# Altium PCB Frost5000Beta_PCB.PcbDoc
Units mm, origin at the board's own origin, x right, y up, seen from the top; angles counter-clockwise.
Board outline 48.5 x 30.5 mm, 2 copper layers (Top Layer, Bottom Layer), stack 0.871 mm thick; 77 components, 62 nets, 271 pads, 180 vias.
Unrouted connection lines stored in the file: 179.
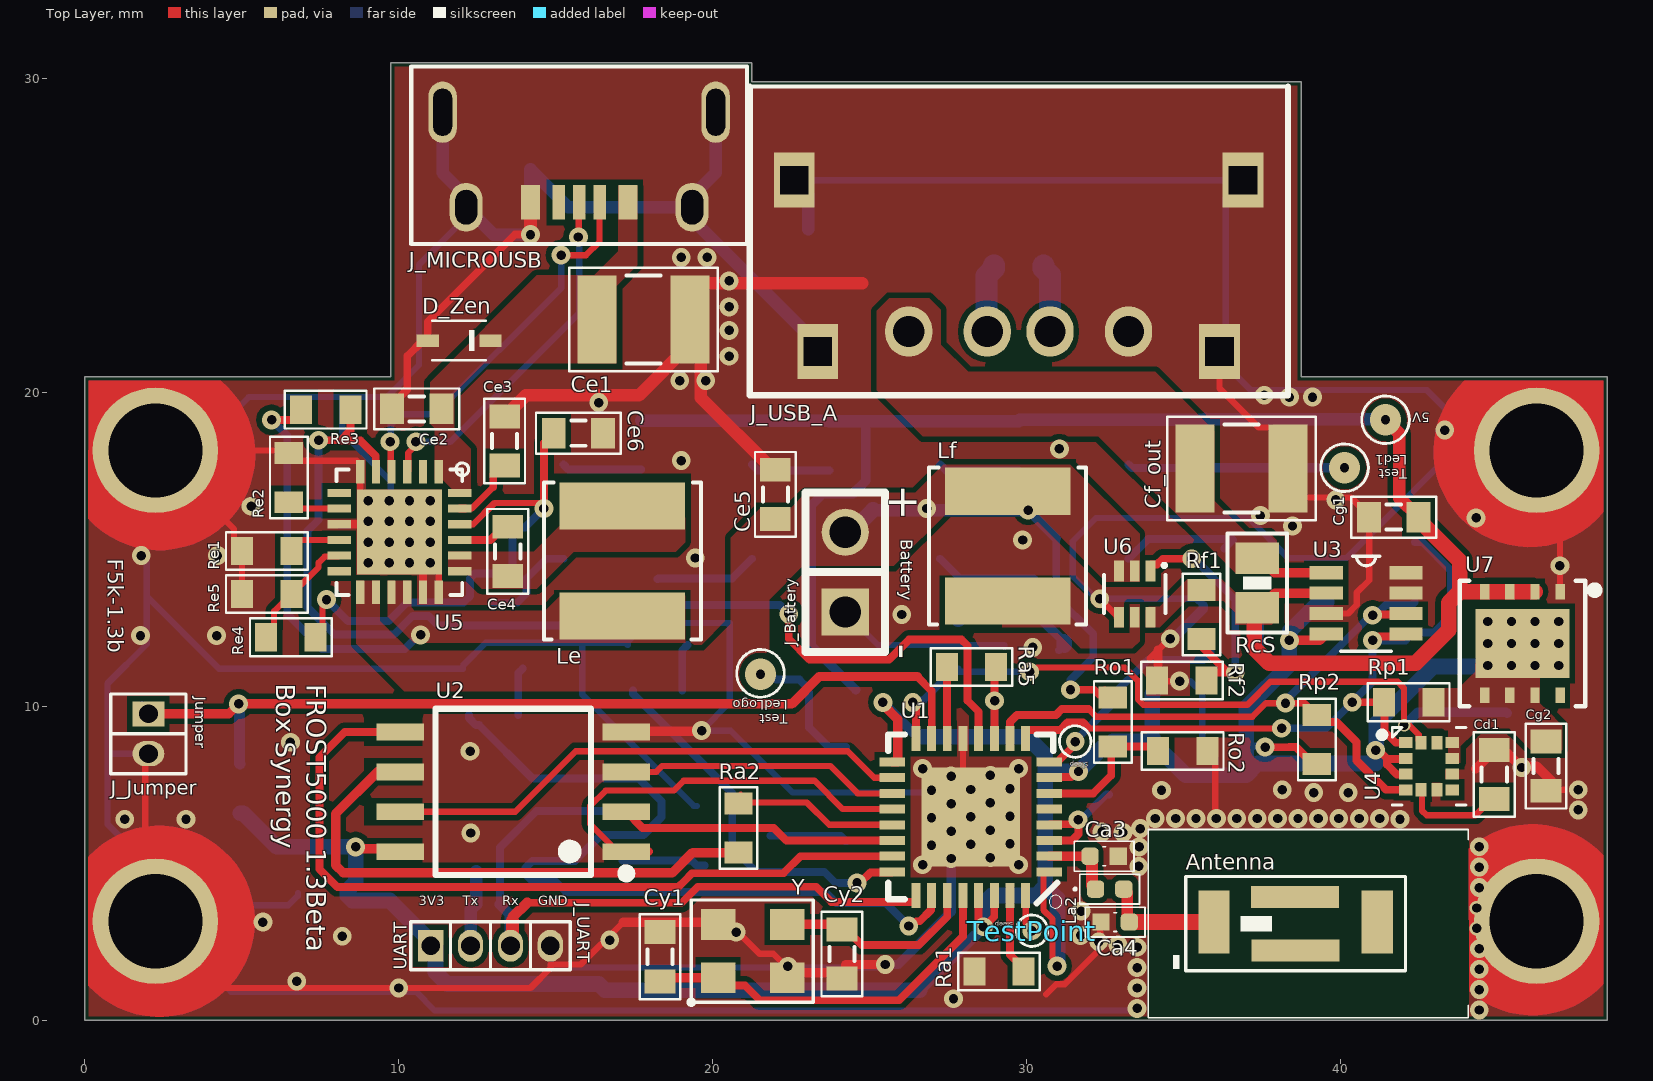
[diagram p0: Top Layer view]
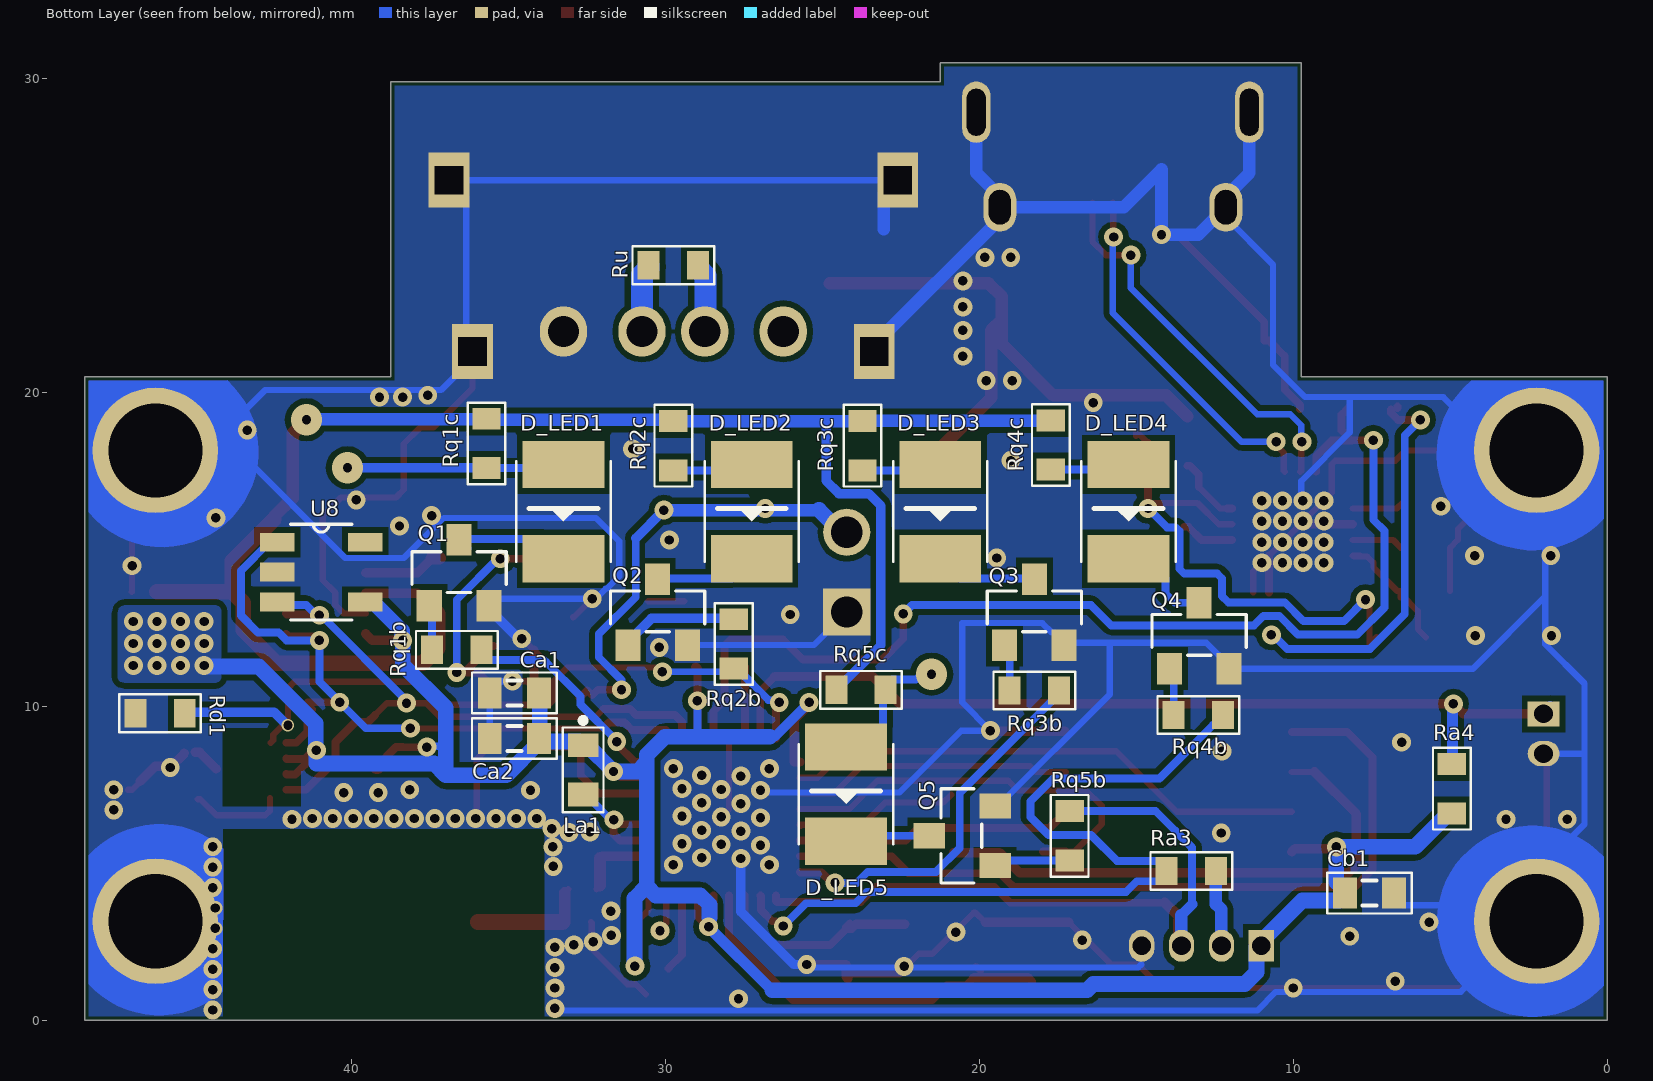
[diagram p1: Bottom Layer view, seen from below]

## Layer stack, top to bottom
Top Solder: solder mask 0.0102, Solder Resist, Dk 3.5
Top Layer: signal copper 0.0356
Dielectric 1: dielectric 0.8, FR-4, Dk 4.8
Bottom Layer: signal copper 0.0356
Bottom Solder: solder mask 0.0102, Solder Resist, Dk 3.5

## Board outline
0,0 0,20.5 9.75,20.5 9.75,30.5 21.25,30.5 21.25,29.9 38.75,29.9 38.75,20.5 48.5,20.5 48.5,0

## Design rules (kind name [scope] priority, off if disabled: settings)
Clearance [All] p1: gap=0.18 ignorepadtopadclearanceinfootprint=FALSE except(0.1: Arc-SMDPad Track-SMDPad SMDPad-SMDPad)
ComponentClearance [All] p1: gap=0.099 collisioncheckmode=3 verticalgap=0.254 showdistances=FALSE
HoleSize [All] p1: absolutevalues=TRUE maxlimit=3 minlimit=0.025 maxpercent=80.000 minpercent=20.000
MinimumSolderMaskSliver [All] p1: minsoldermaskwidth=0.039
PlaneConnect [All] p1: planeconnectstyle=Direct reliefexpansion=0.508 reliefentries=4 reliefconductorwidth=0.254 reliefairgap=0.254
PolygonConnect [All] p1: connectstyle=Direct reliefconductorwidth=0.254 reliefentries=4 polygonreliefangle="90 Angle" airgapwidth=0.254
RoutingVias [All] p1: holewidth=0.3 width=0.6 viastyle="Through Hole" minholewidth=0.008 minwidth=0.4 maxholewidth=4 maxwidth=7.1
SilkToSilkClearance [All] p1: silktosilkclearance=0
SilkToSolderMaskClearance [IsPad] p1: minsilkscreentomaskgap=0.099 clearancetoexposedcopper=TRUE
SolderMaskExpansion [All] p1: expansion=0.102
Width [All] p1: maxlimit=1.2 minlimit=0.2 preferedwidth=0.3
24 further rules are at their usual default settings.

## Components (designator, comment, footprint, x,y, rotation, side; value= is the part's Value field where it differs from the comment)
Antenna "2450AT42B100E" ANTENNA_CERAMIC 38.975,3.075 r180 top
Ca1 "10uF" CAP_0603 34.815,10.425 r0 bottom
Ca2 "100nF" CAP_0603 34.815,8.975 r0 bottom
Ca3 "3.0pF" CAP_0402 32.475,5.225 r0 top
Ca4 "2.4pF" CAP_0402 32.825,3.125 r180 top
Cb1 "4.7uF" CAP_0603 7.575,4.05 r180 bottom
Cd1 "220nF" CAP_0603 44.9,7.825 r90 top
Ce1 "22uF" CAP_1210 17.8,22.325 r0 top
Ce2 "1uF" CAP_0603 10.575,19.475 r0 top
Ce3 "10uF" CAP_0603 13.375,18.45 r270 top
Ce4 "47nF" CAP_0603 13.475,14.935 r270 top
Ce5 "10uF" CAP_0603 22,16.75 r270 top
Ce6 "4.7uF" CAP_0603 15.725,18.7 r0 top
Cf_out "22uF" CAP_1210 36.85,17.575 r0 top
Cg1 "22uF" CAP_0603 41.7,16.025 r180 top
Cg2 "22uF" CAP_0603 46.55,8.094 r270 top
Cy1 "22pF" CAP_0603 18.325,2.02 r90 top
Cy2 "22pF" CAP_0603 24.12,2.11 r270 top
D_LED1 "LCB TTSD-T2V1-2J8L-Z" LED_PLCC-2 33.25,16.2 r90 bottom locked
D_LED2 "LCB TTSD-T2V1-2J8L-Z" LED_PLCC-2 27.25,16.2 r90 bottom locked
D_LED3 "LCB TTSD-T2V1-2J8L-Z" LED_PLCC-2 21.25,16.2 r90 bottom locked
D_LED4 "LCB TTSD-T2V1-2J8L-Z" LED_PLCC-2 15.25,16.2 r90 bottom locked
D_LED5 "LCB TTSD-T2V1-2J8L-Z" LED_PLCC-2 24.25,7.2 r90 bottom locked
D_Zen "DDZ12ASF-7" ZENER-SOD323F 11.925,21.65 r180 top
J_Battery "Connx2_Battery" BATTERY 24.225,14.275 r270 top
J_Jumper "M50-3530242" "JUMPER-1.27 MM" 2.025,9.125 r270 top
J_MICROUSB "CQ-MUB-FS8772" "MICRO USB" 19.35,25.9 r180 top
J_UART "M50-3530442" UART-1.27MM 12.925,2.371 r0 top
J_USB_A "CQ-USB-AFFS90" USB-A__IPX8 33.25,21.94 r180 top
La1 "4.3nH" IND_0603 32.65,7.95 r270 bottom
La2 "2.2nH" IND_0402 32.65,4.175 r0 top
Le "SRN5040TA-1R0M" INDUCTOR_SRN5040 17.125,14.625 r90 top
Lf "SRN5040TA-1R0M" INDUCTOR_SRN5040 29.4,15.1 r90 top
Q1 "ZXT11N20DF" TRANSISTOR_SOT23-3 36.575,14.25 r180 bottom
Q2 "ZXT11N20DF" TRANSISTOR_SOT23-3 30.25,13 r180 bottom
Q3 "ZXT11N20DF" TRANSISTOR_SOT23-3 18.25,13 r180 bottom
Q4 "ZXT11N20DF" TRANSISTOR_SOT23-3 13,12.25 r180 bottom
Q5 "ZXT11N20DF" TRANSISTOR_SOT23-3 20.55,5.875 r90 bottom
Ra1 "12K +- 1%" RES_0603 29.125,1.55 r180 top
Ra2 "200" RES_0603 20.825,6.125 r270 top
Ra3 "499" RES_0603 13.25,4.75 r180 bottom
Ra4 "1K" RES_0603 4.95,7.375 r270 bottom
Ra5 "5.6K" RES_0603 28.25,11.25 r0 top
RcS "ERJ-6BWFR010V" RES-SHUNT-0805 37.351,13.925 r270 top
Rd1 "1K" RES_0603 46.1,9.779 r180 bottom
Re1 "261" RES_0603 5.8,14.95 r180 top
Re2 "205" RES_0603 6.5,17.285 r90 top
Re3 "2.2K" RES_0603 7.675,19.45 r180 top
Re4 "10K" RES_0603 6.565,12.199 r0 top
Re5 "10K" RES_0603 5.8,13.575 r0 top
Rf1 "732K" RES_0603 35.575,12.924 r90 top
Rf2 "93.1K" RES_0603 34.95,10.825 r0 top
Ro1 "332K +-1%" RES_0603 32.75,9.5 r270 top
Ro2 "90.9K +- 1%" RES_0603 34.975,8.575 r180 top
Rp1 "10K" RES_0603 42.175,10.129 r180 top
Rp2 "10K" RES_0603 39.25,8.94 r90 top
Rq1b "1K" RES_0603 36.65,11.8 r180 bottom
Rq1c "130" RES_0603 35.7,18.375 r90 bottom
Rq2b "1K" RES_0603 27.825,11.987 r270 bottom
Rq2c "130" RES_0603 29.75,18.3 r90 bottom
Rq3b "1K" RES_0603 18.25,10.5 r180 bottom
Rq3c "130" RES_0603 23.725,18.3 r90 bottom
Rq4b "1K" RES_0603 13.025,9.725 r180 bottom
Rq4c "130" RES_0603 17.725,18.325 r90 bottom
Rq5b "1K" RES_0603 17.125,5.875 r90 bottom
Rq5c "130" RES_0603 23.775,10.525 r0 bottom
Ru "10" RES_0603 29.75,24.05 r180 bottom
TestPoint "TestPoint" TESTPOINT 30.175,2.85 r90 top
U1 "ESP8266EX" ESP8266_QFN32-5X5MM 28.225,6.475 r180 top
U2 "W25Q32JVSSIQ" W25Q32JVSSIQ_SOIC127P790X216-8N 13.65,7.275 r180 top
U3 "INA219BIDCNR" "INA219B SOT23" 40.82,13.28 r0 top
U4 "LSM303AGR" LSM303AGR-LGA12 42.825,8.089 r0 top
U5 "BQ25606RGER" BQ25606 10.025,15.55 r270 top value=Value
U6 "TPS61023DRLT" TPS61023-SOT563 33.45,13.575 r270 top
U7 "LM1117LD-3.3/NOPB" LM1117-3.3-WSON-8 45.8,12 r270 top
U8 "EEPROM 128K" 24CW128 40.969,14.275 r180 bottom
Y "ABM8-26MHz" ABM8-26_OSCSC320X250X100N 21.275,2.2 r90 top

## Footprints (in the part's own frame and the unit in brackets; to place one, negate y for a bottom-side part, rotate by r counter-clockwise, add the part's x,y. Pads: shape width x height; smd on the part's side, far side on the other; paste and mask are expansions set on the pad)
24CW128 [mm] "Footprint EEPROM SOT23"
  rect 1.1x0.6 smd: 1(-1.4,0.95) 2(-1.4,0) 3(-1.4,-0.95) 4(1.4,-0.95) 5(1.4,0.95)
  silkscreen extent -0.97,-1.53 0.97,1.53, body extent -1.25,-1.5 1.25,1.5, height 1.11
ABM8-26_OSCSC320X250X100N [mm] "Crystal de 26MHz"
  rect 0.98x1.1 smd: 1(-0.85,1.1) 2(-0.85,-1.1) 3(0.85,-1.1) 4(0.85,1.1)
  silkscreen extent -1.71,-1.93 1.63,2.04, body extent -1.25,-1.6 1.25,1.6, height 2.63
ANTENNA_CERAMIC [mm] "PCB CERAMIC ANTENNA"
  rect 1x2 smd: 1(3,-0.05) 2(-2.2,-0.05)
  rect 2.8x0.7 smd: 3(0.4,0.85) 4(0.425,-0.85)
  silkscreen extent -5.1,-3 5.1,3, body extent -2.1,-1 2.9,1, height 2.63
BATTERY [mm] "Footprint Battery"
  round 1.5 hole 1: 1(-1.27,0)
  rect 1.5x1.5 hole 1: 2(1.27,0)
  silkscreen extent -2.54,-1.27 2.54,1.27
BQ25606 [mm] "Footprint BQ25606 Charger"
  rect 0.74x0.26 smd mask+0.065: 1(-1.92,1.25) 2(-1.92,0.75) 3(-1.92,0.25) 4(-1.92,-0.25) 5(-1.92,-0.75) 6(-1.92,-1.25) 13(1.92,-1.25) 14(1.92,-0.75) 15(1.92,-0.25) 16(1.92,0.25) 17(1.92,0.75) 18(1.92,1.25)
  rect 0.26x0.74 smd mask+0.065: 7(-1.25,-1.92) 8(-0.75,-1.92) 9(-0.25,-1.92) 10(0.25,-1.92) 11(0.75,-1.92) 12(1.25,-1.92) 19(1.25,1.92) 20(0.75,1.92) 21(0.25,1.92) 22(-0.25,1.92) 23(-0.75,1.92) 24(-1.25,1.92)
  rect 2.7x2.7 smd mask+0.065: 25(0,0)
  silkscreen extent -2.2,-2 2,2.2, body extent -2.05,-2.05 2.05,2.05, height 1.07
CAP_0402 [mm] "Footprint Cap Ceramic 0402"
  rrect50% 0.55x0.55 smd: 1(-0.45,0)
  rect 0.55x0.55 smd: 2(0.45,0)
  silkscreen extent -0.95,-0.48 0.95,0.48, body extent -0.5,-0.25 0.5,0.25, height 0.51
CAP_0603 [mm] "Footprint Cap Ceramic 0603"
  rect 0.762x0.976 smd: 1(-0.785,0) 2(0.785,0)
  silkscreen extent -1.35,-0.65 1.35,0.65, body extent -0.8,-0.4 0.8,0.4, height 0.81
CAP_1210 [mm] "Footprint Cap Ceramic 1210"
  rect 1.24x2.81 smd: 1(-1.485,0) 2(1.485,0)
  silkscreen extent -2.36,-1.65 2.36,1.65, body extent -1.6,-1.25 1.6,1.25, height 0.79
ESP8266_QFN32-5X5MM [mm] "Footprint del ESP8266EX"
  rect 0.8x0.285 smd mask+0.065: 1(-2.5,1.75) 2(-2.5,1.25) 3(-2.5,0.75) 4(-2.5,0.25) 5(-2.5,-0.25) 6(-2.5,-0.75) 7(-2.5,-1.25) 8(-2.5,-1.75) 17(2.5,-1.75) 18(2.5,-1.25) 19(2.5,-0.75) 20(2.5,-0.25) 21(2.5,0.25) 22(2.5,0.75) 23(2.5,1.25) 24(2.5,1.75)
  rect 0.285x0.8 smd mask+0.065: 9(-1.75,-2.5) 10(-1.25,-2.5) 11(-0.75,-2.5) 12(-0.25,-2.5) 13(0.25,-2.5) 14(0.75,-2.5) 15(1.25,-2.5) 16(1.75,-2.5) 25(1.75,2.5) 26(1.25,2.5) 27(0.75,2.5) 28(0.25,2.5) 29(-0.25,2.5) 30(-0.75,2.5) 31(-1.25,2.5) 32(-1.75,2.5)
  rect 3.15x3.15 smd paste-3: EP(0,0)
  silkscreen extent -2.9,-2.63 2.63,2.9, body extent -2.5,-2.5 2.5,2.5, height 1.55
"INA219B SOT23" [mm] "Current Monitor"
  rect 1.067x0.42 smd mask+0.09: 1(-1.27,0.975) 2(-1.275,0.325) 3(-1.27,-0.325) 4(-1.27,-0.975) 5(1.27,-0.975) 6(1.27,-0.325) 7(1.27,0.325) 8(1.27,0.975)
  silkscreen extent -0.81,-1.52 0.81,1.5, body extent -1.4,-1.47 1.4,1.47, height 1.2
IND_0402 [mm] "Footprint de Inductor 0402"
  rrect50% 0.55x0.55 smd: 1(-0.45,0) 2(0.45,0)
  silkscreen extent -1.14,-0.48 0.95,0.48, body extent -0.5,-0.3 0.5,0.3, height 0.51
IND_0603 [mm] "Footprint de Inductor 0603"
  rect 0.762x0.976 smd: 1(-0.81,0.025) 2(0.76,0.025)
  silkscreen extent -1.67,-0.63 1.33,0.67, body extent -0.8,-0.45 0.8,0.5, height 0.81
INDUCTOR_SRN5040 [mm] "Inductor_SRN5040"
  rect 1.5x4 smd: 1(-1.75,0) 2(1.75,0)
  silkscreen extent -2.5,-2.5 2.5,2.5, body extent -2.5,-2.5 2.5,2.5, height 4.01
"JUMPER-1.27 MM" [mm] "Footprint Jumper"
  rect 0.8x1.016 hole 0.6: 1(-0.635,0)
  oval 0.8x1.016 hole 0.6: 2(0.635,0)
  silkscreen extent -1.27,-1.2 1.28,1.2, body extent -1.27,-1.2 1.27,1.2, height 4.85
LED_PLCC-2 [mm] "Footprint_LED_PLCC-2"
  rect 1.5x2.6 smd: 1(-1.5,0) 2(1.5,0)
  silkscreen extent -1.6,-1.5 1.6,1.5, body extent -1.73,-1.4 1.85,1.4, height 1.67
LM1117-3.3-WSON-8 [mm] "Footprint del LDO de Texas"
  rect 0.5x0.3 smd mask+0.07: 1(-1.65,1.2) 2(-1.65,0.4) 3(-1.65,-0.4) 4(-1.65,-1.2) 5(1.65,-1.2) 6(1.65,-0.4) 7(1.65,0.4) 8(1.65,1.2)
  rect 2.2x3 smd mask+0.07: 9(0,0)
  silkscreen extent -2,-2 2,2.4, body extent -2,-2 2,2, height 0.81
LSM303AGR-LGA12 [mm] "Footprint LSM303AGR"
  rect 0.43x0.35 smd mask+0.033: 1(-0.745,0.75) 2(-0.745,0.25) 3(-0.745,-0.25) 4(-0.745,-0.75) 7(0.745,-0.75) 8(0.745,-0.25) 9(0.745,0.25) 10(0.745,0.75)
  rect 0.35x0.43 smd mask+0.033: 5(-0.25,-0.745) 6(0.25,-0.745) 11(0.25,0.745) 12(-0.25,0.745)
  silkscreen extent -1.6,-1.24 1.17,1.24, body extent -1,-1 1,1, height 0.97
"MICRO USB" [mm] "Footprint MicroUSB"
  oval 0.9x1.95 hole 0.6 slot 1.5 at 90 deg: 0(-0.75,-3.025) 0(7.95,-3.025)
  oval 1.05x1.55 hole 0.7 slot 1.1 at 90 deg: 0(0,0) 0(7.2,0)
  rect 0.6x1.1 smd mask+0.08: 1(2.05,-0.15) 5(5.15,-0.15)
  rect 0.4x1.1 smd mask+0.08: 2(2.95,-0.15) 3(3.6,-0.15) 4(4.25,-0.15)
  silkscreen extent -1.75,-4.47 8.95,1.17, body extent -1.35,-7.02 8.55,0.28, height 4.32
RES-SHUNT-0805 [mm] "SHUNT 0805"
  rect 1x1.4 smd: 1(-0.785,0) 2(0.785,0)
  silkscreen extent -1.57,-0.95 1.58,0.95, body extent -0.99,-0.66 1.03,0.61, height 0.63
RES_0603 [mm] "Footprint Resistor 0603"
  rect 0.7x0.9 smd: 1(-0.785,0) 2(0.785,0)
  silkscreen extent -1.3,-0.6 1.3,0.6, body extent -0.8,-0.4 0.8,0.4, height 0.46
TESTPOINT [mil] "Via_TestPoint"
  round 15 all layers, no hole: 1(0,0)
TPS61023-SOT563 [mm] "Footprint Boost"
  rect 0.66x0.31 smd mask+0.07: 1(-0.735,0.5) 2(-0.735,0) 3(-0.735,-0.5) 4(0.735,-0.5) 5(0.735,0) 6(0.735,0.5)
  silkscreen extent -0.96,-0.97 0.6,0.99, body extent -0.81,-0.8 0.81,0.8, height 0.6
TRANSISTOR_SOT23-3 [mm] "Transistor NPN"
  rect 0.8x1 smd: B(-0.95,-1.05) C(0,1.05) E(0.95,-1.05)
  silkscreen extent -1.5,-0.63 1.5,0.67, body extent -1.5,-1.25 1.5,1.25, height 1.11
UART-1.27MM [mm] "Socket UART"
  rect 0.8x1.016 hole 0.6: 1(-1.905,0)
  oval 0.8x1.016 hole 0.6: 2(-0.635,0) 3(0.635,0) 4(1.905,0)
  silkscreen extent -2.54,-0.76 2.54,0.76, body extent -2.54,-1.2 2.54,1.2, height 4.85
USB-A__IPX8 [mm] "Footprint del USB tipo A"
  rect 1.3x1.75 hole 0.9 square: 0(-3.65,-4.82) 0(-2.9,0.64) 0(9.9,0.64) 0(10.65,-4.82)
  oval 1.5x1.6 hole 1: 1(7,0) 2(4.5,0) 3(2.5,0) 4(0,0)
  silkscreen extent -5.08,-7.8 12.07,2.03, body extent -4.15,-10.95 11.15,1.2, height 7.46
W25Q32JVSSIQ_SOIC127P790X216-8N [mil] "Memoria Flash SOIC8 SS"
  rect 60x21 smd: 1(-141.73,75) 2(-141.73,25) 3(-141.73,-25) 4(-141.73,-75) 5(141.73,-75) 6(141.73,-25) 7(141.73,25) 8(141.73,75)
  silkscreen extent -151,-104 97,111, body extent -161,-106 161,106, height 85
ZENER-SOD323F [mm] "Fooprint Zener"
  rect 0.71x0.403 smd: A(1,0) C(-1,0)
  silkscreen extent -0.85,-0.63 0.85,0.63, body extent -1.25,-0.67 1.25,0.68, height 1.01

## Part data
Antenna: library part AntennaCeramic, "Ceramic Antenna SMD", Supplier Part Number 1=609-2450AT42B100E, Supplier 1=Mouser
Ca1 Ca2 Cb1 Cd1 Ce2 Ce3 Ce4 Ce5 Ce6 Cg1 Cg2 Cy1 Cy2: library part Cap_0603_Ceramic, "Capac Ceramic SMD 0603"
Ca3 Ca4: library part Cap_0402, "Capac Ceramic SMD 0402"
Ce1 Cf_out: library part Cap_1210_Ceramic, "Capac Ceramic SMD 1210"
D_LED1 D_LED2 D_LED3 D_LED4 D_LED5: library part LCB_TTSD, "Blue LED PLCC-2", Package="0603 Broadcom", Availability=Unavailable, MF="Broadcom Limited", MP=HSMW-C191, Price=None, SnapEDA_Link=https://www.snapeda.com/parts/HSMW-C191/Broadcom%20Limited/view-part/1840124/?ref=snap
D_Zen: library part Zener, "Zener 11.5V-0.5W", Package="SOD-123 Littelfuse", Supplier Part Number 1=621-DDZ12ASF-7, Availability=Unavailable, MF=Littelfuse, MP=SMF5.0AT1G, Price=None, SnapEDA_Link=https://www.snapeda.com/parts/SMF5.0AT1G/Littelfuse/view-part/4502608/?ref=snap, Supplier 1=Mouser
J_Battery: "NO SOCKET"
J_Jumper: library part Jumper, "1.27mm Pin Header 2x1", Supplier Part Number 1=855-M50-3530242, Supplier 1=Mouser
J_MICROUSB: library part MicroUSB, "MicroUSB B-type Socket"
J_UART: library part Connx4_UART, "1.27mm Pin Header 4x1", Supplier Part Number 1=855-M50-3530442, Supplier 1=Mouser
J_USB_A: library part "USB-A 5V", "USB-A Socket"
La1: library part Ind_0603, "Inductor SMD 0603", Package="0603 Murata", Availability=Unavailable, MF=Murata, MP=LQP03TN62NHZ2D, Price=None, SnapEDA_Link=https://www.snapeda.com/parts/LQP03TN62NHZ2D/Murata/view-part/4472751/?ref=snap
La2: library part Ind_0402, "Inductor SMD 0402", Package="0603 Murata", Availability=Unavailable, MF=Murata, MP=LQP03TN62NHZ2D, Price=None, SnapEDA_Link=https://www.snapeda.com/parts/LQP03TN62NHZ2D/Murata/view-part/4472751/?ref=snap
Le Lf: library part Ind_SRN5040, "Inductor 1uH 5A", Package="Nonstandard Vishay Dale", Supplier Part Number 1=652-SRN5040TA-1R0M, Availability=Unavailable, MF="Vishay Dale", Price=None, SnapEDA_Link=https://www.snapeda.com/parts/IHLP-2525CZ-01/Vishay%20Dale/view-part/561997/?ref=snap, Supplier 1=Mouser
Q1 Q2 Q3 Q4 Q5: "Transistor NPN Low Saturation Vce - SOT23-3", Supplier Part Number 1=522-ZXT11N20DFTA, Supplier 1=Mouser
Ra1 Ra2 Ra3 Ra4 Ra5 Rd1 Re1 Re2 Re3 Re4 Re5 Rf1 Rf2 Ro1 Ro2 Rp1 Rp2 Rq1b Rq1c Rq2b Rq2c Rq3b Rq3c Rq4b Rq4c Rq5b Rq5c Ru: library part Res_0603, "Resistor SMD", LatestRevisionDate=17-Jul-2002, LatestRevisionNote="Re-released for DXP Platform.", PackageDescription="Axial Device, Thru-Hole; 2 Leads; 0.3 in Pin Spacing", PackageReference=AXIAL-0.3, Published=8-Jun-2000, Publisher="Altium Limited"
RcS: library part Shunt_0805, "Shunt 0.01 Ohm 0.5W 1% SMD Resistor", Supplier Part Number 1=667-ERJ-6BWFR010V, LatestRevisionDate=17-Jul-2002, LatestRevisionNote="Re-released for DXP Platform.", PackageDescription="Axial Device, Thru-Hole; 2 Leads; 0.3 in Pin Spacing", PackageReference=AXIAL-0.3, Published=8-Jun-2000, Publisher="Altium Limited", Supplier 1=Mouser
U1: "Microcontrolador ESP8266", Package="VFQFN-32 Espressif Systems", Supplier Part Number 1=356-ESP8266EX, Availability=Unavailable, MF="Espressif Systems", MP=ESP8266, Price=None, SnapEDA_Link=https://www.snapeda.com/parts/ESP8266/Espressif%20Systems/view-part/106411/?ref=snap, Supplier 1=Mouser
U2: "FLASH - NOR Memory IC 32Mb _4M x 8_ SPI - Quad I/O 133MHz 8-SOIC", Package="SOIC-8 Winbond", Availability=Unavailable, MF=Winbond, MP=W25Q32JVSSIQ, Price=None, SnapEDA_Link=https://www.snapeda.com/parts/W25Q32JVSSIQ/Winbond%20Electronics/view-part/596953/?ref=snap
U3: "Current Monitor Regulator High-Side 10mA SOT-23-8", Package="SOT-23 Texas Instruments", Supplier Part Number 1=595-INA219BIDCNR, Digi-Key_Part_Number=296-46420-1-ND, Digi-Key_Purchase_URL=https://www.digikey.com.au/product-detail/en/texas-instruments/INA219BIDCNR/296-46420-1-ND/7033594?utm_source=snapeda&utm_medium=aggregator&utm_campaign=symbol, MF="Texas Instruments", MP=INA219BIDCNR, SnapEDA_Link=https://www.snapeda.com/parts/INA219BIDCNR/Texas%20Instruments/view-part/870494/?ref=snap, Supplier 1=Mouser
U4: "Accelerometer, Magnetometer", Package="VFLGA-12 STMicroelectronics", Supplier Part Number 1=497-16527-1-ND, Availability=Unavailable, MF=STMicroelectronics, MP=LSM303AGR, Price=None, SnapEDA_Link=https://www.snapeda.com/parts/LSM303AGR/STMicroelectronics/view-part/3601838/?ref=snap, Supplier 1=Digi-Key
U5: "Battery Charger 3A", Manufacturer="Texas Instruments", Supplier Part Number 1=595-BQ25606RGER, Copyright="Copyright (C) 2018 Accelerated Designs. All rights reserved", PartNumber=BQ25606RGER, RefDes=RefDes, Supplier 1=Mouser, Type=DEV
U6: "Boost Switching Regulator 3A", Package="SOT-563 Texas Instruments", Supplier Part Number 1=595-TPS61023DRLR, Availability=Unavailable, MF="Texas Instruments", MP=TPS61023DRLT, Price=None, SnapEDA_Link=https://www.snapeda.com/parts/TPS61023DRLT/Texas%20Instruments/view-part/4477974/?ref=snap, Supplier 1=Mouser
U7: "LDO Regulator Pos 3.3V 0.8A Texas - WSON8", Package="SOT-223-3 Analog Devices", Supplier Part Number 1=926-LM1117LD33NOPB, Availability=Unavailable, MF="Analog Devices", MP=LT1117IST-5#PBF, Price=None, SnapEDA_Link=https://www.snapeda.com/parts/LT1117IST-5%23PBF/Analog%20Devices/view-part/4348177/?ref=snap, Supplier 1=Mouser
U8: library part 24CW1280T-I/OT, Supplier Part Number 1=579-24CW1280T-I/OT, Supplier 1=Mouser
Y: "26MHz ±10ppm Crystal 10pF 50 Ohms 4-SMD, No Lead", Package="SMD-4 Abracon", Supplier Part Number 1=815-ABM8-26-T, Digi-Key_Part_Number=300-8230-1-ND, Digi-Key_Purchase_URL=https://www.digikey.com/product-detail/en/abracon-llc/ABM8-26.000MHZ-10-1-U-T/300-8230-1-ND/687923?utm_source=snapeda&utm_medium=aggregator&utm_campaign=symbol, MF=Abracon, MP=ABM8-26.000MHZ-10-1-U-T, SnapEDA_Link=https://www.snapeda.com/parts/ABM8-26.000MHZ-10-1-U-T/Abracon%20LLC/view-part/356267/?ref=snap, Supplier 1=Mouser

## Free pads (board coordinates)
  round 4 hole 3: H(2.25,3.15) H(2.25,18.15) H(46.25,3.15) H(46.25,18.15)

## Via types
v1: diameter 0.6, hole 0.3, Top Layer to Bottom Layer, tented both sides, 172 vias
v2: diameter 1, hole 0.3, Top Layer to Bottom Layer, 3 vias
v3: diameter 0.6, hole 0.3, Top Layer to Bottom Layer, 2 vias
v4: diameter 0.45, hole 0.3, Top Layer to Bottom Layer, 2 vias
v5: diameter 0.4, hole 0.3, Top Layer to Bottom Layer, tented both sides, 1 vias

## Nets (pads, with @x,y where several pads share a name; then routed paths per layer and width w, separated by ;. In a path a pad name is that pad's centre, name@x,y a point inside that pad or via, vN(x,y) a via of type N, cw(c..) or ccw(c..) an arc to the next point about the centre after c; other vN are vias at no path point)
3.3uC: La1.2 U1.3 U1.4 | length 3.9
  Top Layer w0.25: U1.3 31.45,5.725 31.658,5.933 31.658,6.372 31.63,6.4 31.473,6.242 30.742,6.242 U1.4
  Bottom Layer w0.25: v1@31.644,6.291 32.543,7.19 La1.2
  Bottom Layer w0.3: v1@31.644,6.291 v1(31.644,6.386)
3.3V: Ca1.1 Ca2.1 Cb1.1 Cg2.1 J_UART.1 La1.1 Ra4.2 Ra5.2 Rp1.1 Rp2.1 U1.1 U1.7 U1.11 U1.17 U1.29 U1.30 U2.8 U3.4 U4.2 U4.3 U4.9 U4.10 U7.5 U7.6 U7.7 U7.9 U8.4 | length 87.7
  Top Layer w0.2: v1(28.625,2.975) v1@28.65,2.975 ; U1.1 30.542,4.725 30.542,3.508 30.825,3.225 v1@30.825,1.983
  Top Layer w0.25: v1@28.475,3.233 U1.29 ; v1@28.65,2.975 28.975,3.3 U1.30 ; U1.11@28.983,8.983 v1(28.983,10.175) Ra5.2@28.983,11.198 ; U1.7@30.733,7.717 30.758,7.742 v1@31.424,7.742 ; v1@37.874,8.695 38.376,8.695 38.381,8.7 38.583,8.7 Rp2.1@39.189,8.094 ; v1(41.12,8.6) 41.214,8.6 41.489,8.325 ; U4.3 42.066,7.825 41.8,7.825 41.489,8.136 41.489,8.325 ; U4.2 42.066,8.325 41.489,8.325
  Top Layer w0.3: v1(8.628,5.523) 8.685,5.465 9.955,5.465 U2.8 ; v1(25.425,10.125) 25.425,10.053 25.893,9.585 25.893,8.233 25.885,8.225 U1.17 ; Ra5.2@28.983,11.198 Ra5.2 ; v1(38.375,12.1) 39.345,12.1 U3.4
  Top Layer w0.5: Rp2.1@39.189,8.094 Rp2.1
  Bottom Layer w0.25: v1(28.983,10.175) 28.983,9.042 29,9.025 ; 37,8.725 37.577,8.725 v1(37.602,8.7)
  Bottom Layer w0.3: v1(25.425,10.125) 26.525,9.025 26.675,9.025
  Bottom Layer w0.35: 26.6,0.95 v1(28.625,2.975)
  Bottom Layer w0.5: Ra4.2 5.05,6.59 6.117,5.523 v1(8.628,5.523) 8.628,4.399 8.36,4.132 Cb1.1 8.36,3.968 8.516,3.812 9.713,3.812 11.17,2.355 11.17,1.527 11.547,1.15 16.374,1.15 16.574,0.95 26.6,0.95 ; 26.675,9.025 29,9.025 30.025,9.025 30.6,8.45 30.6,8.218 ; v1@28.6,3.268 28.6,3.682 28.893,3.975 30.307,3.975 30.6,4.268 ; v1(30.975,1.725) 30.989,1.739 30.989,3.879 30.6,4.268 ; v1(31.656,7.923) 32.493,8.76 La1.1 32.745,8.88 33.935,8.88 Ca2.1 34.03,8.843 35.073,7.8 37,7.8 ; v1@31.702,7.925 30.893,7.925 30.6,8.218 ; Ca2.1@34.005,9.329 34.005,10.4 Ca1.1 ; U8.4 39.319,13.325 38.394,12.4 38.394,12.119 v1(38.375,12.1) 38.375,11.325 37,9.95 37,8.725 37,7.8 ; v1(44.7,11.3) 44.67,11.27 42.955,11.27 41.139,9.454 41.139,8.619 v1(41.12,8.6) 41.12,8.175 37.375,8.175 37,7.8 ; 30.6,4.268 30.6,8.218
  other v1: 45.45,11.3 46.2,11.3 46.95,11.3 44.7,12 45.45,12 46.2,12 46.95,12 44.7,12.7 45.45,12.7 46.2,12.7 46.95,12.7
5V: Cg1.1 RcS.2 Rf1.2 Rq1c.2 Rq2c.2 Rq3c.2 Rq4c.2 Rq5c.2 U3.2 U6.6 U7.2 U7.3 U7.4 | length 55
  Top Layer w0.2: U7.4@44.55,13.7 U7.4
  Top Layer w0.3: RcS.2@37.445,13.14 37.91,13.605 U3.2 ; Cg1.1@42.485,15.943 Cg1.1
  Top Layer w0.4: v2(41.438,19.128) 41.875,18.69 41.875,16.635 Cg1.1
  Top Layer w0.5: RcS.2@37.45,13.14 37.255,12.945 37.255,11.845 37.73,11.37 42.393,11.37 43.45,12.427 43.45,13.3 43.8,13.65 ; Cg1.1@42.485,15.943 43.8,14.628 43.8,13.65 ; U7.2 U7.3 U7.4 43.8,13.65
  Bottom Layer w0.3: Rq5c.2 23.145,11.94 23.145,16.395 23.525,16.775 24.475,16.775 24.879,17.179 24.879,19.039 24.925,19.085
  Bottom Layer w0.4: Rq4c.2 17.738,19.097 23.713,19.097 Rq3c.2 24.925,19.085 Rq2c.2 29.787,19.122 35.662,19.122 Rq1c.2 35.716,19.144 41.421,19.144 v2(41.438,19.128)
5Vin: Ce1.1 Ce2.2 D_Zen.C J_MICROUSB.1 U5.1 U5.24
5Vout: Cf_out.1 J_USB_A.1 RcS.1 U3.1 | length 2.5
  Top Layer w0.3: RcS.1@37.445,14.71 37.9,14.255 U3.1
  Top Layer w0.4: RcS.1@37.2,14.71 RcS.1@37.445,14.71
A-Colector1: D_LED1.1 Q1.C | length 4
  Bottom Layer w0.25: D_LED1.1 33.875,15.325 36.55,15.325 Q1.C Q1.C@36.3,15.025
A-Colector2: D_LED2.1 Q2.C | length 3.3
  Bottom Layer w0.25: D_LED2.1 27.875,14.075 30.225,14.075 Q2.C
A-Colector3: D_LED3.1 Q3.C | length 3.3
  Bottom Layer w0.25: Q3.C 18.275,14.075 20.625,14.075 D_LED3.1
A-Colector4: D_LED4.1 Q4.C | length 3.1
  Bottom Layer w0.25: Q4.C 13.775,13.3 14.075,13.6 14.075,14.075 14.7,14.7 D_LED4.1
A-Colector5: D_LED5.1 Q5.C | length 2.5
  Bottom Layer w0.25: Q5.C@21.85,5.875 24.075,5.875 D_LED5.1
ADCin: Ro1.2 Ro2.2 U1.6 | length 4.6
  Top Layer w0.25: U1.6 32.125,7.225 32.7,7.8 32.7,8.665 Ro1.2 34.05,8.715 Ro2.2
Base1: Q1.B Rq1b.1 | length 1.4
  Bottom Layer w0.25: Rq1b.1 37.435,13.11 Q1.B
Base2: Q2.B Rq2b.1 | length 4
  Bottom Layer w0.25: Q2.B@31.035,11.785 Q2.B
  Bottom Layer w0.3: Rq2b.1@27.853,12.8 30.45,12.8 Q2.B@31.2,12.05
  Bottom Layer w0.5: Rq2b.1 Rq2b.1@27.853,12.8 ; Q2.B Q2.B@31.2,12.05
Base3: Q3.B Rq3b.1 | length 1.5
  Bottom Layer w0.25: Rq3b.1 19.035,11.785 Q3.B
Base4: Q4.B Rq4b.1 | length 1.5
  Bottom Layer w0.25: Rq4b.1 13.81,11.06 Q4.B
Base5: Q5.B Rq5b.1 | length 2.7
  Bottom Layer w0.25: Rq5b.1 19.335,5.09 Q5.B Q5.B@19.75,4.925
CLK_MEM: Ra2.2 U2.6 | length 17.4
  Top Layer w0.2: U2.6@9.326,7.91 U2.6
  Top Layer w0.3: U2.6@9.326,7.91 7.998,6.581 7.998,4.932 8.235,4.695 18.718,4.695 19.363,5.34 Ra2.2
CS_MEM: U1.20 U2.1 | length 13.1
  Top Layer w0.2: U2.1 16.983,5.37 16.105,6.248 16.105,6.83 16.59,7.315 18.765,7.315 19.075,7.625 23.25,7.625 24.15,6.725 U1.20
  Top Layer w0.25: U2.1 U2.1@17.974,5.37
D+: J_MICROUSB.3 U5.3 | length 11.5
  Top Layer w0.2: U5.3 10.305,17.5 10.305,18.072 10.55,18.317 v1(10.55,18.425) ; v1(15.725,24.95) 15.737,24.963 15.737,26.037 J_MICROUSB.3
  Bottom Layer w0.2: v1(10.55,18.425) 11.65,18.425 15.755,22.53 15.755,24.92 v1(15.725,24.95)
D-: J_MICROUSB.2 U5.4 | length 12.5
  Top Layer w0.2: v1(9.725,18.425) 9.75,18.4 9.75,17.495 U5.4 ; v1(15.175,24.375) 15.18,24.37 15.965,24.37 16.4,24.805 J_MICROUSB.2
  Bottom Layer w0.2: v1(9.725,18.425) 9.75,18.45 9.75,18.95 10.1,19.3 11.15,19.3 15.175,23.325 v1(15.175,24.375)
DCP+: J_USB_A.3 Ru.1 | length 2.2
  Bottom Layer w0.7: Ru.1 30.535,23.95 30.75,23.735 J_USB_A.3
DCP-: J_USB_A.2 Ru.2 | length 2.2
  Bottom Layer w0.7: J_USB_A.2 28.73,21.96 28.73,23.715 28.965,23.95 Ru.2
DI_MEM: U1.23 U2.5 | length 25.4
  Top Layer w0.25: U2.5 8.28,9.18 7.475,8.375 7.475,4.811 8.046,4.24 18.907,4.24 19.095,4.428 19.347,4.68 22.255,4.68 22.8,5.225 U1.23
DO_MEM: U1.22 U2.2 | length 8.9
  Top Layer w0.25: U2.2 17.765,6.125 21.95,6.125 22.35,5.725 U1.22
GND: Ca1.2 Ca2.2 Ca3.2 Ca4.2 Cb1.2 Cd1.2 Ce1.2 Ce2.1 Ce3.1 Ce5.1 Ce6.2 Cf_out.2 Cg1.2 Cg2.2 Cy1.2 Cy2.2 D_Zen.A J_Battery.2 J_Jumper.2 J_MICROUSB.0 J_MICROUSB.5 J_UART.4 J_USB_A.0 J_USB_A.4 pad.H Q1.E Q2.E Q3.E Q4.E Q5.E Ra1.2 Rd1.1 Re1.2 Re2.2 Re5.1 Rf2.1 Ro2.1 U1.13 U1.EP U2.4 U3.3 U3.7 U3.8 U4.6 U4.8 U5.6 U5.9 U5.17 U5.18 U5.25 U6.4 U7.1 U8.2 Y.2 Y.4 | length 331.7
  Top Layer w0.2: J_Jumper.2 1.93,8.395 1.93,3.47 4.375,1.025 14.198,1.025 14.84,1.667 14.84,1.775 15.805,1.775 17.15,3.12 ; Re5.1@5.005,13.675 5.005,15.05 4.755,15.3 4.755,15.645 2.25,18.15 6.42,18.15 Re2.2 6.75,17.82 8.665,17.82 8.775,17.71 U5.6 8.775,16.8 9.775,15.8 U5.25 10.775,14.8 11.275,14.3 U5.18 ; U2.4 U2.4@17.273,9.203 ; v1@19.627,9.203 v1(19.65,9.225) ; Y.4@19.82,3.12 20.125,3.425 20.185,3.425 21.495,2.115 21.935,2.115 Y.2@22.535,1.515 ; Cy2.2@24,1.515 Cy2.2@24.19,1.325 ; U1.13 27.975,6.725 v1(28.225,6.475) ; 30.625,0.825 30.945,1.145 31.215,1.145 32.35,2.279 32.35,3.1 Ca4.2 ; v1(32.335,13.425) 32.935,12.825 U6.4 ; 33.925,11.525 34.19,11.79 34.55,12.15 v1(34.58,12.15) ; Rf2.1@34.19,10.525 34.19,10.576 34.415,10.801 v1(34.877,10.801) ; Ro2.1 36.01,8.325 36.01,6.465 v1(36.05,6.425) ; J_USB_A.0@36.15,21.3 36.15,20.125 37.395,18.88 37.815,18.88 38.335,18.36 38.335,16.9 38.585,16.65 40.339,16.65 40.915,16.074 40.915,14.015 40.525,13.625 40.525,13.23 40.25,12.955 U3.3 ; pad.H@46.25,18.15 46.993,17.407 46.993,13.657 U7.1 ; Cg2.2@46.737,7.606 46.737,7.596 46.993,7.34 47.125,7.34
  Top Layer w0.25: Ce2.1 9.79,19.607 10.275,20.092 10.275,21.154 10.771,21.65 D_Zen.A 10.925,22.25 13.7,25.025 v1(14.2,25.025)
  Top Layer w0.26: U5.9 U5.25@9.775,15.8 ; U5.17 U5.25@10.775,14.8
  Top Layer w0.3: 17.15,3.12 Y.4@19.82,3.12 ; U2.4@17.273,9.203 v1@19.627,9.203 ; Y.2@22.535,1.515 Cy2.2@24,1.515 ; Cy2.2@24.19,1.325 24.247,1.382 24.247,1.762 24.26,1.775 v1(25.501,1.775) ; Rf2.1@34.19,10.525 34.19,11.79 ; 44.312,8.005 44.843,8.535 Cd1.2@44.975,8.535 ; Cd1.2@45.325,8.5 45.729,8.096 46.246,8.096 Cg2.2@46.737,7.606
  Top Layer w0.4: Ce3.1 14.048,19.908 17.653,19.908 19.285,21.54 Ce1.2 ; v1(14.2,25.025) J_MICROUSB.5 ; Ce5.1 21.918,17.535 19.627,19.826 19.627,21.983 Ce1.2 ; 24.765,23.475 19.705,23.475 19.285,23.055 Ce1.2
  Bottom Layer w0.2: J_Jumper.2@1.78,8.69 J_Jumper.2@1.85,8.69 ; J_Jumper.2 0.76,8.49 0.725,8.525 ; Cb1.2 6.79,3.968 6.484,3.662 2.762,3.662 pad.H@2.25,3.15 ; v1@9.75,16.6 9.75,17.175 8.2,18.725 8.2,19.85 ; J_MICROUSB.0@12.15,25.9 12.15,25.826 12.15,25.575 10.65,24.075 10.65,20.875 9.625,19.85 8.2,19.85 ; 14.84,1.775 14.935,1.68 25.298,1.68 25.393,1.775 v1(25.501,1.775) ; Q5.E 19.4,6.825 15.85,10.375 15.85,12.025 ; J_USB_A.0@22.6,26.76 36.9,26.76 36.35,26.21 36.35,21.5 36.15,21.3 36.15,21.075 37.15,20.075 37.575,20.075 42.756,20.075 pad.H@44.681,18.15 ; J_Battery.2 25.28,11.95 Q2.E Q2.E@29.3,11.9 ; v1(26.975,7.325) 26.9,7.25 22.55,7.25 20.575,9.225 v1(19.65,9.225) 20.55,10.125 20.55,12.65 18,12.65 17.7,12.35 17.6,12.35 17.3,12.05 Q3.E 17.225,12.025 15.85,12.025 ; v1@33.525,0.307 11.148,0.307 10.555,0.9 4.667,0.9 2.417,3.15 pad.H@2.25,3.15 ; v1(34.877,10.801) 35.224,10.801 Ca1.2 Ca2.2 ; Q1.E 35.4,13.425 v1(32.335,13.425) 32.227,13.425 31.902,13.75 31.867,13.75 31.475,14.142 31.475,15.258 32.217,16 37.058,16 38.333,14.725 40.202,14.725 43.627,18.15 pad.H@44.681,18.15 ; pad.H@46.25,18.15 44.783,18.15 pad.H@44.681,18.15 ; 0.725,8.525 0.725,10.725 1.975,11.975 1.975,13.5 ; 0.725,8.525 0.725,6.244 2.25,4.719 pad.H@2.25,3.15 ; 1.975,13.5 1.975,17.875 2.25,18.15 3.517,18.15 5.217,19.85 8.2,19.85 ; 1.975,13.5 4.275,11.2 Q4.E 12.05,11.3 12.775,12.025 15.85,12.025
  Bottom Layer w0.3: v1(25.501,1.775) 25.916,1.775 27.6,3.459 v1(27.6,5.15) ; v1(34.58,12.15) 34.637,12.207 34.732,12.207 35.625,13.1 Q1.E
  Bottom Layer w0.4: J_MICROUSB.0@11.4,28.925 11.4,26.991 12.15,26.241 J_MICROUSB.0@12.15,25.9 ; J_MICROUSB.0@12.15,25.826 12.45,25.526 12.524,25.526 13.025,25.025 v1(14.2,25.025) 14.2,27.1 15.4,25.9 J_MICROUSB.0@19.35,25.9 ; J_MICROUSB.0@20.1,28.925 20.1,26.991 19.35,26.241 J_MICROUSB.0@19.35,25.9 ; J_USB_A.0@22.6,26.76 23.05,26.31 23.05,25.19 ; J_USB_A.0@23.8,21.94 23.35,21.49 23.35,21.525 19.35,25.525 J_MICROUSB.0@19.35,25.9
  other v1: 44.425,0.325 33.525,0.375 27.675,0.685 44.425,0.975 10,1.025 33.525,1.025 6.75,1.242 44.425,1.625 33.525,1.675 22.4,1.715 44.425,2.275 33.525,2.325 32.92,2.4 32.3,2.5 16.725,2.55 8.2,2.675 31.725,2.7 20.75,2.805 5.675,3.125 31.738,3.475 44.425,4.225 44.425,4.875 33.575,4.9 26.689,4.95 29.75,4.95 28.85,5.175 33.587,5.523 44.425,5.525 26.975,5.575 28.225,5.6 29.475,5.625 12.296,5.963 33.075,5.98 32.406,6 27.6,6.025 28.85,6.05 33.625,6.105 1.275,6.4 3.225,6.4 41.9,6.4 34.1,6.425 34.75,6.425 35.4,6.425 36.7,6.425 37.35,6.425 38,6.425 38.65,6.425 39.3,6.425 39.95,6.425 40.6,6.425 41.25,6.425 26.975,6.45 29.475,6.5 47.575,6.7 27.6,6.9 28.85,6.925 39.15,7.25 40.25,7.25 34.302,7.325 28.225,7.35 38.15,7.34 47.575,7.34 29.475,7.375 27.6,7.775 28.85,7.8 26.689,8.014 29.75,8.014 45.775,8.05 12.275,8.57 6.55,8.855 30.2,11.875 1.775,12.25 4.2,12.25 26.025,12.925 46.993,14.475 9.025,14.575 9.695,14.575 10.345,14.575 11,14.575 19.45,14.725 1.8,14.8 4.225,14.8 9.025,15.225 9.695,15.225 10.345,15.225 11,15.225 29.875,15.296 38.475,15.743 9.025,15.9 9.695,15.9 10.345,15.9 11,15.9 44.325,16 37.45,16.074 5.3,16.375 9.025,16.55 9.695,16.55 10.345,16.55 11,16.55 39.85,16.575 18.999,17.826 31.05,18.2 43.325,18.8 16.375,19.675 38.375,19.85 39.111,19.85 37.575,19.908 18.955,20.375 19.78,20.375 20.525,21.15 20.525,21.975 20.525,22.725 20.525,23.55 19,24.3 19.825,24.3
  other v4: 44.34,2.925 44.34,3.575
GPIO2: Ra5.1 U1.14 | length 2.3
  Top Layer w0.25: Ra5.1 27.465,8.985 U1.14
HOLD_MEM: U1.18 U2.7 | length 16.8
  Top Layer w0.2: U2.7 13.715,6.64 15.645,8.57 24.305,8.57 25.15,7.725 U1.18
JUMPER: J_Jumper.1 Ra4.1 U1.15 | length 29.1
  Top Layer w0.25: 26.516,10.95 26.983,10.483 U1.15@26.983,8.983
  Top Layer w0.3: J_Jumper.1 4.585,9.76 v1(4.9,10.075) 22.525,10.075 23.4,10.95 26.516,10.95
  Bottom Layer w0.35: J_Jumper.1@1.817,9.992 J_Jumper.1@1.85,9.96 ; v1(4.9,10.075) 4.925,10.05 4.925,8.185 Ra4.1
K-Colector1: D_LED1.2 Rq1c.1 | length 6.9
  Bottom Layer w0.25: D_LED1.2 33.36,17.59 Rq1c.1
  Bottom Layer w0.3: Rq1c.1 35.705,17.595 40.125,17.595 v2(40.13,17.6)
K-Colector2: D_LED2.2 Rq2c.1 | length 2.6
  Bottom Layer w0.25: D_LED2.2 27.435,17.515 Rq2c.1
K-Colector3: D_LED3.2 Rq3c.1 | length 2.6
  Bottom Layer w0.25: D_LED3.2 21.435,17.515 Rq3c.1
K-Colector4: D_LED4.2 Rq4c.1 | length 2.5
  Bottom Layer w0.25: D_LED4.2 15.41,17.54 Rq4c.1
K-Colector5: D_LED5.2 Rq5c.1 | length 4.4
  Bottom Layer w0.25: v2(21.525,11.025) 21.853,11.025 22.028,10.85 22.765,10.85 22.99,10.625 Rq5c.1 23.075,10.44 23.075,9.325 23.7,8.7 D_LED5.2
LED1: Rq1b.2 U1.8 | length 6.8
  Top Layer w0.25: U1.8 30.983,8.225 31.552,8.794 v3(31.552,8.875)
  Bottom Layer w0.25: v3(31.552,8.875) 31.552,8.899 32.708,10.056 32.708,10.316 33.798,11.406 ; 33.867,11.475 35.64,11.475 35.865,11.7 Rq1b.2
LED2/INT: Rd1.2 Rq2b.2 U1.16 U4.12 | length 24
  Top Layer w0.2: v1(30.1,11.1) 30.208,11.1 30.344,11.236 33.129,11.236 33.55,10.815 33.55,10.219 33.719,10.05 37.041,10.05 37.77,10.779 41.823,10.779 42.027,10.575 v5(42.027,9.4) 42.191,9.4 42.495,9.097 42.495,8.914 U4.12
  Top Layer w0.25: U1.16 v1@26.475,9.93
  Bottom Layer w0.2: Rq2b.2 27.725,11.202 27.827,11.1 v1(30.1,11.1)
  Bottom Layer w0.25: v1(26.375,10.125) 26.442,10.192 26.714,10.192 Rq2b.2@27.725,11.202
  Bottom Layer w0.3: v5(42.027,9.4) 42.054,9.4 42.459,9.805 45.288,9.805 Rd1.2
LED3: Rq3b.2 U1.24 | length 12
  Top Layer w0.25: v1(24.6,4.375) 24.695,4.375 25.027,4.708 25.708,4.708 U1.24
  Bottom Layer w0.25: Rq3b.2 17.465,10.4 20.625,7.24 20.625,5.488 21.388,4.725 23.558,4.725 23.908,4.375 v1(24.6,4.375)
LED4: Ra3.1 Rq4b.2 U1.26 | length 27.3
  Top Layer w0.25: v1(26.25,3) 26.345,3 26.495,3.15 26.6,3.15 26.958,3.508 26.958,3.958 U1.26
  Bottom Layer w0.25: Rq4b.2 12.24,9.625 12.465,9.4 12.565,9.4 14.265,7.7 17.65,7.7 18.375,6.975 18.375,6.475 17.8,5.9 16.442,5.9 15.617,5.075 14.26,5.075 14.035,4.85 Ra3.1 14.035,4.65 14.26,4.425 14.989,4.425 15.327,4.088 23.587,4.088 23.95,3.725 25.525,3.725 v1(26.25,3)
LED5/U0RXD: J_UART.3 Rq5b.2 U1.25 | length 22.2
  Top Layer w0.25: 14.092,3.742 19.017,3.742 19.525,4.25 23.3,4.25 23.78,3.77 26.458,3.77 26.475,3.787 U1.25
  Top Layer w0.33: 13.625,3.175 13.625,3.275 14.092,3.742
  Top Layer w0.4: J_UART.3 13.625,2.436 13.625,3.175
  Bottom Layer w0.25: 13.225,3.688 13.225,5.5 14.385,6.66 Rq5b.2
  Bottom Layer w0.33: 13.225,3.688 13.57,3.343
  Bottom Layer w0.4: J_UART.3@13.57,2.371 13.57,3.343
NetAntenna_1: Antenna.1 Ca4.1 La2.2 | length 3.8
  Top Layer w0.2: La2.2 La2.2@33.213,4.062 ; Ca4.1@33.213,3.187 Ca4.1
  Top Layer w0.375: Ca4.1@33.213,3.187 La2.2@33.213,4.062
  Top Layer w0.5: Ca4.1 Antenna.1
NetCd1_1: Cd1.1 U4.5 | length 3
  Top Layer w0.2: 42.6,7.08 42.6,6.675 42.75,6.525 44.303,6.525 44.818,7.04 Cd1.1
NetCe3_2: Ce3.2 U5.23 | length 2.2
  Top Layer w0.2: U5.23@12.112,16.3 12.325,16.3 13.012,16.987
  Top Layer w0.25: U5.23@11.95,16.305 U5.23 U5.23@12.112,16.3 ; 13.012,16.987 13.012,17.384 13.293,17.665 Ce3.2
NetCe4_1: Ce4.1 U5.21 | length 1.7
  Top Layer w0.25: U5.21 12.923,15.3 13.343,15.72 Ce4.1
NetCe4_2: Ce4.2 Le.2 U5.19 U5.20
NetLf_1: Lf.1 U6.5 | length 1.2
  Top Layer w0.2: Lf.1 Lf.1@30.55,13.35
NetR220: Ra2.1 U1.21 | length 5.3
  Top Layer w0.2: Ra2.1@20.9,7.185 21.15,6.935 23.004,6.935 23.714,6.225 U1.21 U1.21@25.69,6.19
NetRe1_1: Re1.1 U5.10 | length 1.6
  Top Layer w0.2: Re1.1@6.575,15.05 6.825,15.3 U5.10
NetRe2_1: Re2.1 U5.8 | length 1.7
  Top Layer w0.2: Re2.1 6.7,16.3 U5.8
NetRe4_1: Re4.1 Re5.2 U5.11 | length 4.2
  Top Layer w0.2: Re4.1 6.03,12.45 6.03,13.03 Re5.2@6.58,13.58 ; Re5.2@6.585,13.475 Re5.2 6.585,13.675 6.697,13.675 7.449,14.426 7.449,14.579 7.64,14.77 8.075,14.77 U5.11 U5.11@7.865,14.8
NetRf1_1: Rf1.1 Rf2.2 U6.1 | length 8.4
  Top Layer w0.25: U6.1 33.95,14.485 33.98,14.515 34.155,14.515 34.34,14.7 v1(35.262,14.7) ; Rf1.1@35.475,11.915 35.575,11.915 36.348,11.142 36.583,11.142 v1(36.65,11.075) 36.583,11.008 36.516,11.075 35.96,11.075 35.735,10.85 Rf2.2
  Bottom Layer w0.25: v1@35.303,14.74 36.65,13.393 v1(36.65,11.075)
R12k: Ra1.1 U1.31 | length 2.5
  Top Layer w0.25: U1.31 29.475,2.085 Ra1.1@29.91,1.65
REGN: Ce6.1 Re4.2 U5.22 | length 17.2
  Top Layer w0.2: Re4.2 7.576,11.974 7.576,13.276 v1(7.7,13.4) ; U5.22 12.378,15.8 13.053,16.475 14.452,16.475 v1(14.626,16.301) ; Ce6.1@14.626,18.386 Ce6.1 ; Ce6.1@15.015,18.618 Ce6.1@15.015,18.7
  Top Layer w0.25: v1(14.626,16.301) Ce6.1@14.626,18.386
  Bottom Layer w0.25: v1(7.7,13.4) 8.387,12.713 9.675,12.713 10.271,13.31 12.069,13.31 12.275,13.516 12.275,14.075 12.425,14.225 13.475,14.225 13.631,14.381 13.631,15.581 13.75,15.7 14.025,15.7 v1(14.626,16.301)
SCL: Rp1.2 U1.9 U3.5 U4.1 U8.1 | length 23.2
  Top Layer w0.2: 31.983,9.3 31.993,9.29 38.115,9.29 v1(38.125,9.3)
  Top Layer w0.25: U1.9 29.975,9.233 29.992,9.25 31.071,9.25 31.301,9.48 31.802,9.48 31.983,9.3 ; v1(40.375,10.13) Rp1.2 Rp1.2 ; v1(41.025,12.1) 41.12,12.1 41.24,12.22 42.005,12.22 U3.5 ; Rp1.2@41.265,9.9 41.39,10.025 41.4,10.015 41.4,9.207 41.767,8.839 U4.1
  Bottom Layer w0.25: v1(38.125,9.3) 39.545,9.3 41.025,10.78 v1(41.025,12.1) 42.075,12.1 42.325,12.35 42.986,12.35 43.525,12.889 43.525,14.319 42.619,15.225 U8.1
SDA: Rp2.2 U1.10 U3.6 U4.4 U8.3 | length 21.7
  Top Layer w0.2: 31.98,9.91 32.221,9.67 37.198,9.67 37.628,10.1 38.875,10.1 Rp2.2
  Top Layer w0.25: U1.10 29.475,9.5 29.7,9.725 30.937,9.725 31.123,9.91 31.98,9.91 ; Rp2.2 39.475,9.5 39.875,9.5 40.515,8.86 40.515,8.275 41.451,7.339 U4.4 ; v1(41.025,12.9) 41.053,12.928 42.063,12.928 U3.6
  Bottom Layer w0.25: v1@38.255,10.1 v1(38.25,10.1) 38.25,10.181 40.969,12.9 v1(41.025,12.9) 41.12,12.9 41.444,13.225 42.269,13.225 U8.3
Sleep: TestPoint.1 U1.32 | length 1.3
  Top Layer w0.2: U1.32 29.975,3.099 30.175,2.899 v3(30.175,2.85) ; TestPoint.1@30.175,2.728 TestPoint.1@30.175,2.777
STAT_BAT: Re3.1 U1.12 U5.5 | length 35.9
  Top Layer w0.25: v1(7.45,18.475) 8.125,18.475 8.137,18.462 ; Re3.1@8.25,19.5 8.46,19.29 8.46,18.785 8.137,18.462 ; U5.5 9.27,17.475 9.27,17.975 8.783,18.462 8.137,18.462 ; v1(22.425,12.945) 22.425,12.15 23.088,11.488 25.625,11.488 26.263,12.125 27.925,12.125 28.125,11.925 28.125,10.177 28.475,9.827 U1.12
  Bottom Layer w0.25: v1(7.45,18.475) 7.45,15.942 7.095,15.587 7.095,13.149 7.961,12.283 9.853,12.283 10.449,12.88 10.951,12.88 11.256,12.575 15.8,12.575 16.45,13.225 22.145,13.225 v1(22.425,12.945)
SYS: Le.1 Re3.2 U5.15 U5.16 | length 12.7
  Top Layer w0.25: v1@5.775,19.095 5.805,19.125 v1(5.95,19.125) 6.665,19.125 6.89,19.35 Re3.2 ; Re3.2@6.68,19.5 Re3.2@6.68,19.55
  Bottom Layer w0.25: v1(5.95,19.125) 6.45,18.625 6.45,12.937 7.562,11.825 10.195,11.825 10.645,12.275 v1(10.7,12.275)
U0TXD: J_UART.2 Ra3.2 | length 2.4
  Bottom Layer w0.4: J_UART.2@12.3,2.371 12.3,3.535 12.465,3.7 Ra3.2
UC/Inductor: Ca3.1 La2.1 U1.2 | length 2.4
  Top Layer w0.2: Ca3.1 Ca3.1@32.087,5.163 ; La2.1@32.087,4.288 La2.1
  Top Layer w0.3: U1.2 Ca3.1
  Top Layer w0.375: La2.1@32.087,4.288 Ca3.1@32.087,5.163
V_BAT: Ce5.2 J_Battery.1 Lf.2 Ro1.1 U5.13 U5.14 U6.2 U6.3 | length 14.6
  Top Layer w0.25: v1(31.402,10.526) 32.157,10.526 32.333,10.35 32.493,10.51 32.718,10.285 Ro1.1
  Bottom Layer w0.25: J_Battery.1 J_Battery.1@24.406,15.545 ; 30.95,15.35 30.95,13.475 32.125,12.3 32.125,11.565 31.4,10.84 31.402,10.838 v1(31.402,10.526)
  Bottom Layer w0.3: v1(30.05,16.25) 30.95,15.35
  Bottom Layer w0.4: 25.111,16.25 v1(30.05,16.25)
  Bottom Layer w0.5: J_Battery.1@24.406,15.545 25.111,16.25
  other v1: 26.825,16.3
WP_MEM: U1.19 U2.3 | length 8.9
  Top Layer w0.2: U2.3 18.21,7.91 18.4,8.1 23.75,8.1 24.625,7.225 U1.19
XTAL_IN: Cy1.1 U1.28 Y.1 | length 12.4
  Top Layer w0.2: Y.1@19.95,1.55 Y.1@20.125,1.725
  Top Layer w0.25: Cy1.1 Cy1.1@18.44,1.35 ; Y.1 20.425,1.1 21.036,1.1 21.501,0.635 25.941,0.635 27.975,2.669 U1.28
  Top Layer w0.3: Cy1.1@18.44,1.35 Y.1
XTAL_OUT: Cy2.1 U1.27 Y.3 | length 6.6
  Top Layer w0.25: Cy2.1@23.918,3.05 24.073,2.895 Cy2.1 24.253,2.895 24.753,2.395 26.57,2.395 27.475,3.3 U1.27 ; Cy2.1@24.132,3.085 Cy2.1@24.256,2.961
  Top Layer w0.3: Y.3 Cy2.1@23.918,3.05
pads on no net: Antenna.2 Antenna.3 Antenna.4 J_MICROUSB.4 U1.5 U4.7 U4.11 U5.2 U5.7 U5.12 U7.8 U8.5

## Polygon pours and split planes (outlines as drawn)
GND on Top Layer "Plano_Masa_Top" (solid, remove dead copper, pour order 58): 0.125,20.375 0.125,0.125 33.85,0.125 33.85,6.1 44.1,6.1 44.1,0.125 48.375,0.125 48.375,20.375 38.625,20.375 38.625,29.775 21.125,29.775 21.125,30.375 9.875,30.375 9.875,20.375
5Vout on Top Layer "Cambiar" (solid, remove dead copper, pour order 56): 36.65,14.255 37.975,14.255 37.975,15.291 37.766,15.5 37.025,15.5 35.975,16.55 35.975,18.775 34.1,20.65 28.15,20.65 27.275,21.525 27.275,22.625 26.9,23 25.625,23 25.225,22.6 25.225,20.07 26.695,18.6 32.287,18.6
3.3V on Top Layer "3.3v_top" (solid, remove dead copper, pour order 36): 46.35,11.475 44.325,11.475 44.3,11.5 44.3,11.1 44.25,11.05 43.775,10.575 42.5,10.575 42.5,9.575 42.775,9.3 43.25,9.3 43.375,9.175 43.375,8.136 43.825,8.136 43.825,8.725 44.4,9.3 45.375,9.3 46.15,8.525 47.075,8.525 47.075,9.375 46.6,9.85 46.35,10.1
5V on Top Layer "5v" (solid, remove dead copper, pour order 52): 33.8,13.166 34.241,13.166 35.125,14.05 36.225,14.05 36.675,13.6 37.91,13.605 37.91,12.599 36.65,12.6 36.65,12.975 36.27,13.355 35.092,13.355 34.25,12.512 33.8,12.517
NetLf_1 on Top Layer "Lf" (solid, remove dead copper, pour order 28): 33.375,11.85 33.6,12.075 33.6,13.25 32.15,13.25 31.4,14 31.39,13.99 29.225,13.99 29.225,12.512 31.063,12.512 31.725,11.85
V_BAT on Top Layer "V_bat" (solid, remove dead copper, pour order 26): 24.525,16.8 26.45,16.8 27.35,17.7 31.4,17.7 33.6,15.5 33.6,13.975 32.525,13.975 30.25,16.25 27.55,16.25 25.775,14.475 22.875,14.475 21.8,13.4 21.8,11.325 21.775,11.325 20.921,10.471 10.179,10.471 8.65,12 8.65,14 9.4,14 9.4,12.725 10.35,11.775 19.725,11.775 20.575,12.625 20.575,15.375 21.5,16.3 22.475,16.3 22.975,16.8
5Vin on Top Layer "5Vin" (solid, remove dead copper, pour order 8): 17,26.575 17.6,26.575 17.6,24.05 16.925,23.375 16.925,20.925 12.725,20.925 11.75,19.95 11.775,19.925 11.775,18.725 12.3,18.2 12.3,16.675 11.95,16.675 11.425,17.2 11.15,17.2 11.15,18.85 11,19 11,20.325 11.1,20.425 14.4,23.725 16.225,23.725 17,24.5
SYS on Top Layer "Sys" (solid, remove dead copper, pour order 24): 9.65,14 10.4,14 10.4,13.15 10.5,13.05 14.675,13.05 15.15,13.525 19.125,13.525 19.125,12.025 10.475,12.025 9.65,12.85
NetCe4_2 on Top Layer "Ce4" (solid, remove dead copper, pour order 6): 11.575,14.925 14.31,14.925 15.385,16 19.125,16 19.125,15.225 18.825,14.925 15.575,14.925 14.4,13.75 12.65,13.75 12.1,14.3 11.575,14.3
GND on Bottom Layer "Plano_Masa_Bottom" (solid, remove dead copper, pour order 48): 0.125,20.375 0.125,0.125 33.85,0.125 33.85,6.1 44.1,6.1 44.1,0.125 48.375,0.125 48.375,20.375 38.625,20.375 38.625,29.775 21.125,29.775 21.125,30.375 9.875,30.375 9.875,20.375
3.3V on Bottom Layer "3.3v_bottom" (solid, remove dead copper, pour order 38): 44.35,13.225 47.2,13.225 cw(c47.2,12.975) 47.45,12.975 47.45,10.95 cw(c47.25,10.95) 47.25,10.75 44.35,10.75 cw(c44.35,10.95) 44.15,10.95 44.15,13.025 cw(c44.35,13.025)

## Other copper
Top Layer:
  region net GND: 0.118,15.968 ccw(c2.375,18.025) 4.325,20.375 0.125,20.375
  region net GND: 0.118,1.098 0.118,5.202 cw(c2.37,3.15)
  region net GND: 44.1,0.928 44.095,5.469 cw(c46.125,3.201) 48.375,5.251 48.375,1.151 cw(c46.125,3.201)
  region net GND: 43.968,20.382 ccw(c46.025,18.125) 48.375,16.175 48.375,20.375
  pour cut-out: 42.4,8.534 43.34,8.534 43.34,7.57 42.4,7.57
Bottom Layer:
  region net GND: 44.1,0.928 44.095,5.468 cw(c46.125,3.201) 48.375,5.251 48.375,1.151 cw(c46.125,3.201)
  region net GND: 0.118,1.098 0.118,5.202 cw(c2.37,3.15)
  region net GND: 43.968,20.382 ccw(c46.025,18.125) 48.375,16.175 48.375,20.375
  region net GND: 0.118,15.968 ccw(c2.375,18.025) 4.325,20.375 0.125,20.375
  pour cut-out: 41.625,9.3 44.11,9.3 44.11,6.815 41.625,6.815
  pour cut-out: 41.775,8.865
  pour cut-out: 41.8,8.85
  pour cut-out: 41.8,8.85

## Silkscreen, mask and mechanical layers (free items; w line width, h text height)
Top Overlay:
  circle w0.09: c30.175,2.85 r0.502
  circle w0.09: c21.525,11.05 r0.76
  circle w0.09: c40.13,17.6 r0.76
  circle w0.09: c41.438,19.128 r0.76
  lines w0.09: 31.939,8.555 cw(c31.552,8.875) 31.95,8.569
  text "5V" at 42.85,19.35 h0.3 r180
  text "Test / Led1" at 42.123,18 h0.3 r180
  text "F5k-1.3b" at 0.725,14.7 h0.5 r270
  text "Box Synergy" at 6.1,10.725 h0.6 r270
  text "FROST5000 1.3Beta" at 7.075,10.7 h0.62 r270
  text "Test / LedLogo" at 22.4,10.2 h0.3 r180
  text "Sleep" at 31.975,8.225 h0.15 r180
  text "Sleep" at 29.575,3.125 h0.15 r180
Top Solder:
  region: 33.875,0 33.875,6.075 44.075,6.075 44.075,0
Bottom Solder:
  region: 8.6,16.975 11.45,16.975 11.45,14.125 8.6,14.125
  region: 26.55,8.15 29.9,8.15 29.9,4.795 26.55,4.795
  region: 44.15,13.225 47.45,13.225 47.45,10.75 44.15,10.75
  pour cut-out: 50.7,11.95
Board Outline:
  the board outline again, w0.1
Top Assembly:
  text "Assembly TOP (F5k-b1.0)" at 22.325,19.55 h0.65
Bottom Assembly:
  text "Assembly BOTTOM (F5k-b1.0)" at 37.05,19.537 h0.65

## Text inside footprints (layer, text, board x,y; h text height)
J_Battery: Top Overlay "-" at 25.622,11.989 h1.02 r270; Top Overlay "+" at 25.622,17.069 h1.02 r270; Top Overlay "Battery" at 26,15.325 h0.38 r270
J_Jumper: Top Overlay "Jumper" at 3.525,10.305 h0.34 r270
J_UART: Top Overlay "UART" at 10.258,1.609 h0.41 r90; Top Overlay "3V3" at 10.639,3.66 h0.3; Top Overlay "Tx" at 12.036,3.66 h0.3; Top Overlay "Rx" at 13.306,3.66 h0.3; Top Overlay "GND" at 14.449,3.66 h0.3